# Altium PCB hat_template 2023.PcbDoc (part 1 of 2)
Units mm, origin at the board's own origin, x right, y up, seen from the top; angles counter-clockwise.
Board outline 64 x 85 mm, 4 copper layers (Top Layer, Ground Plane, Power Plane, Bottom Layer), stack 0.844 mm thick; 119 components, 62 nets, 322 pads, 111 vias.
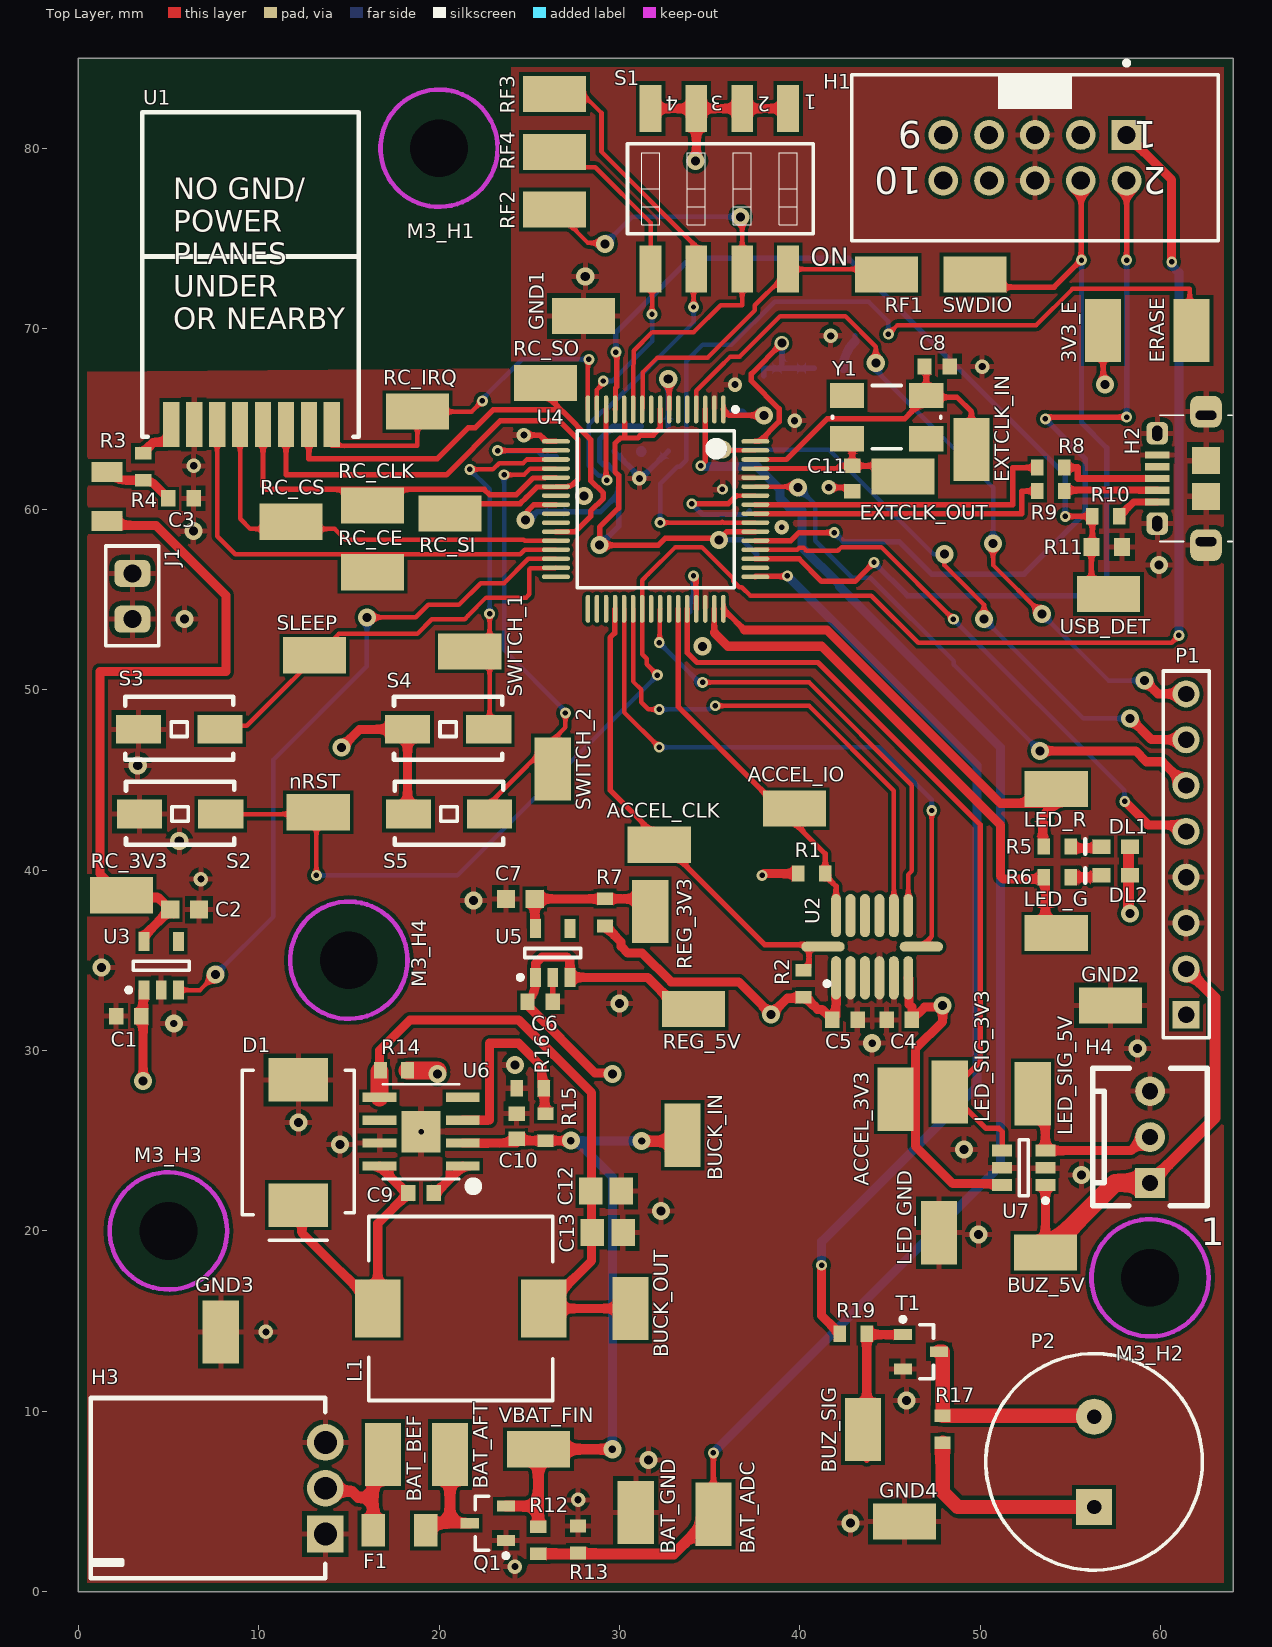
[diagram p0: Top Layer view]
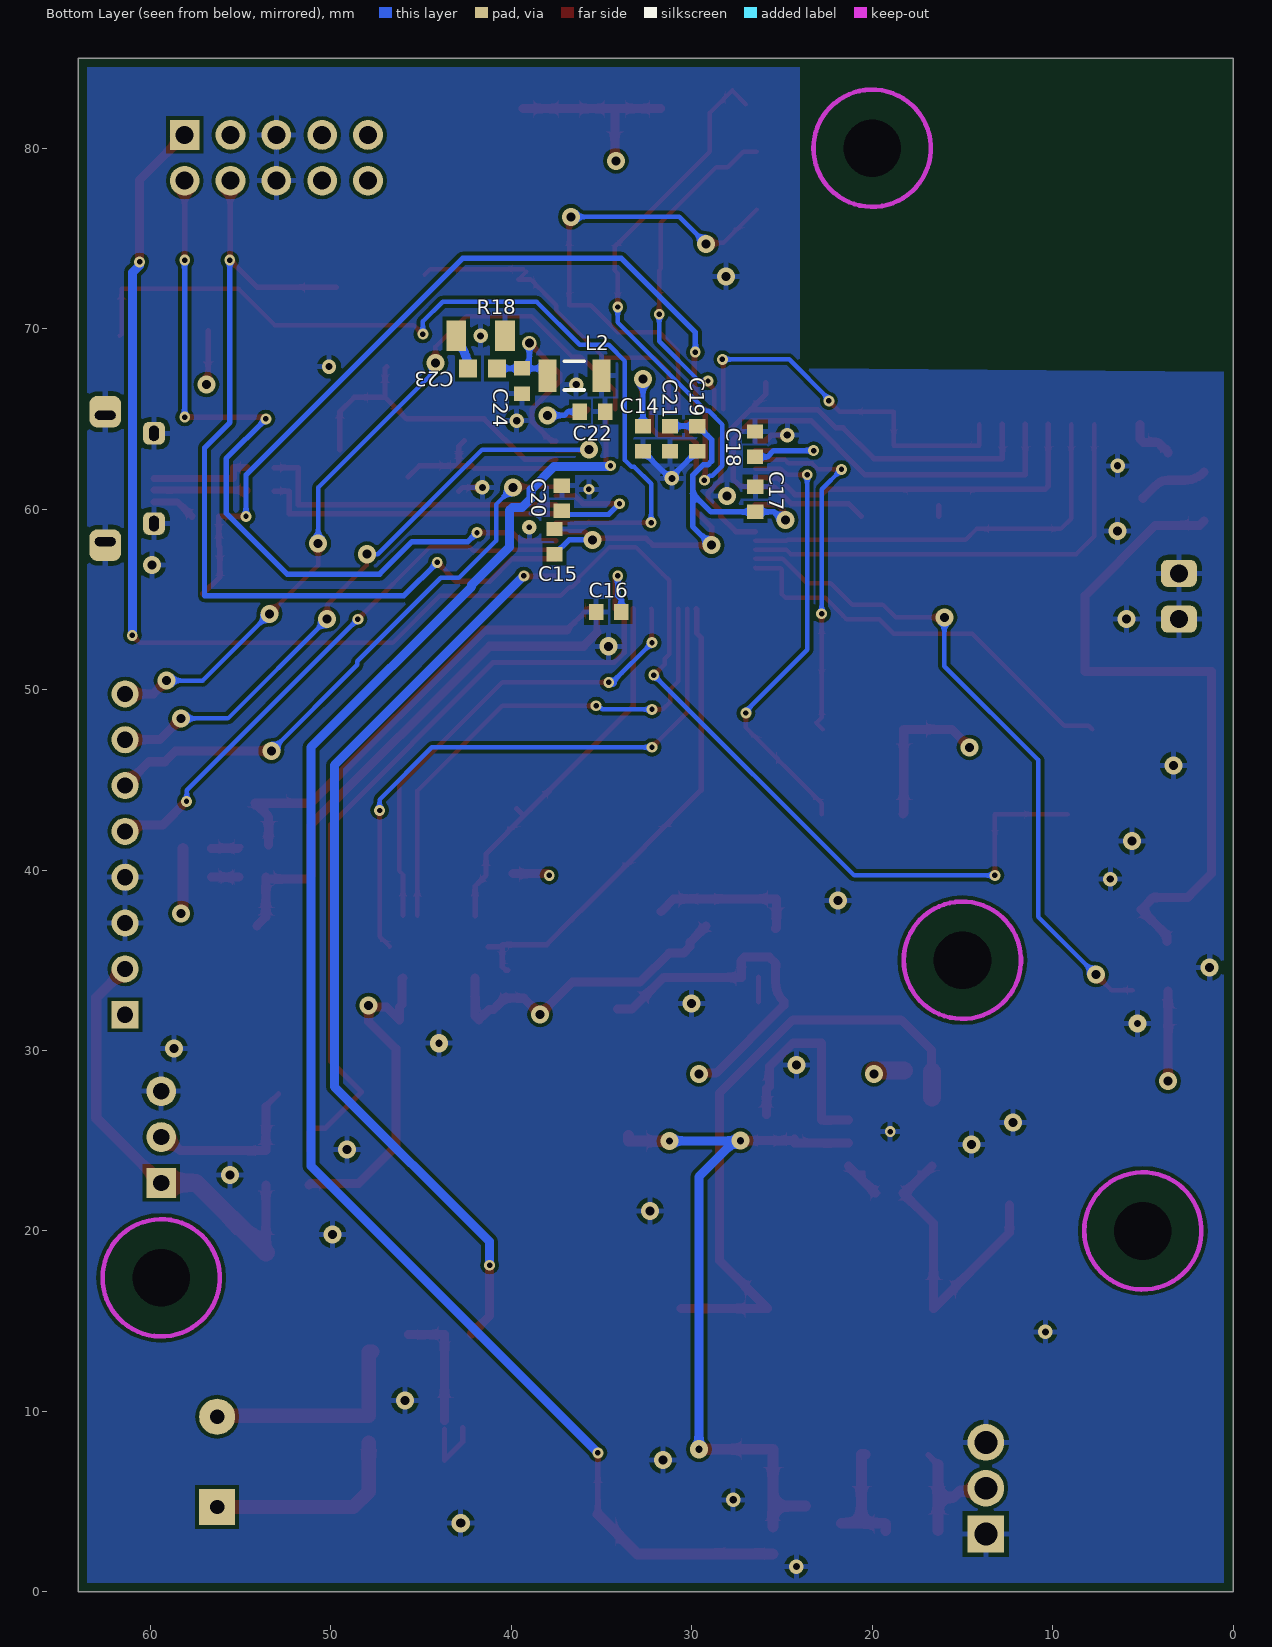
[diagram p1: Bottom Layer view, seen from below]
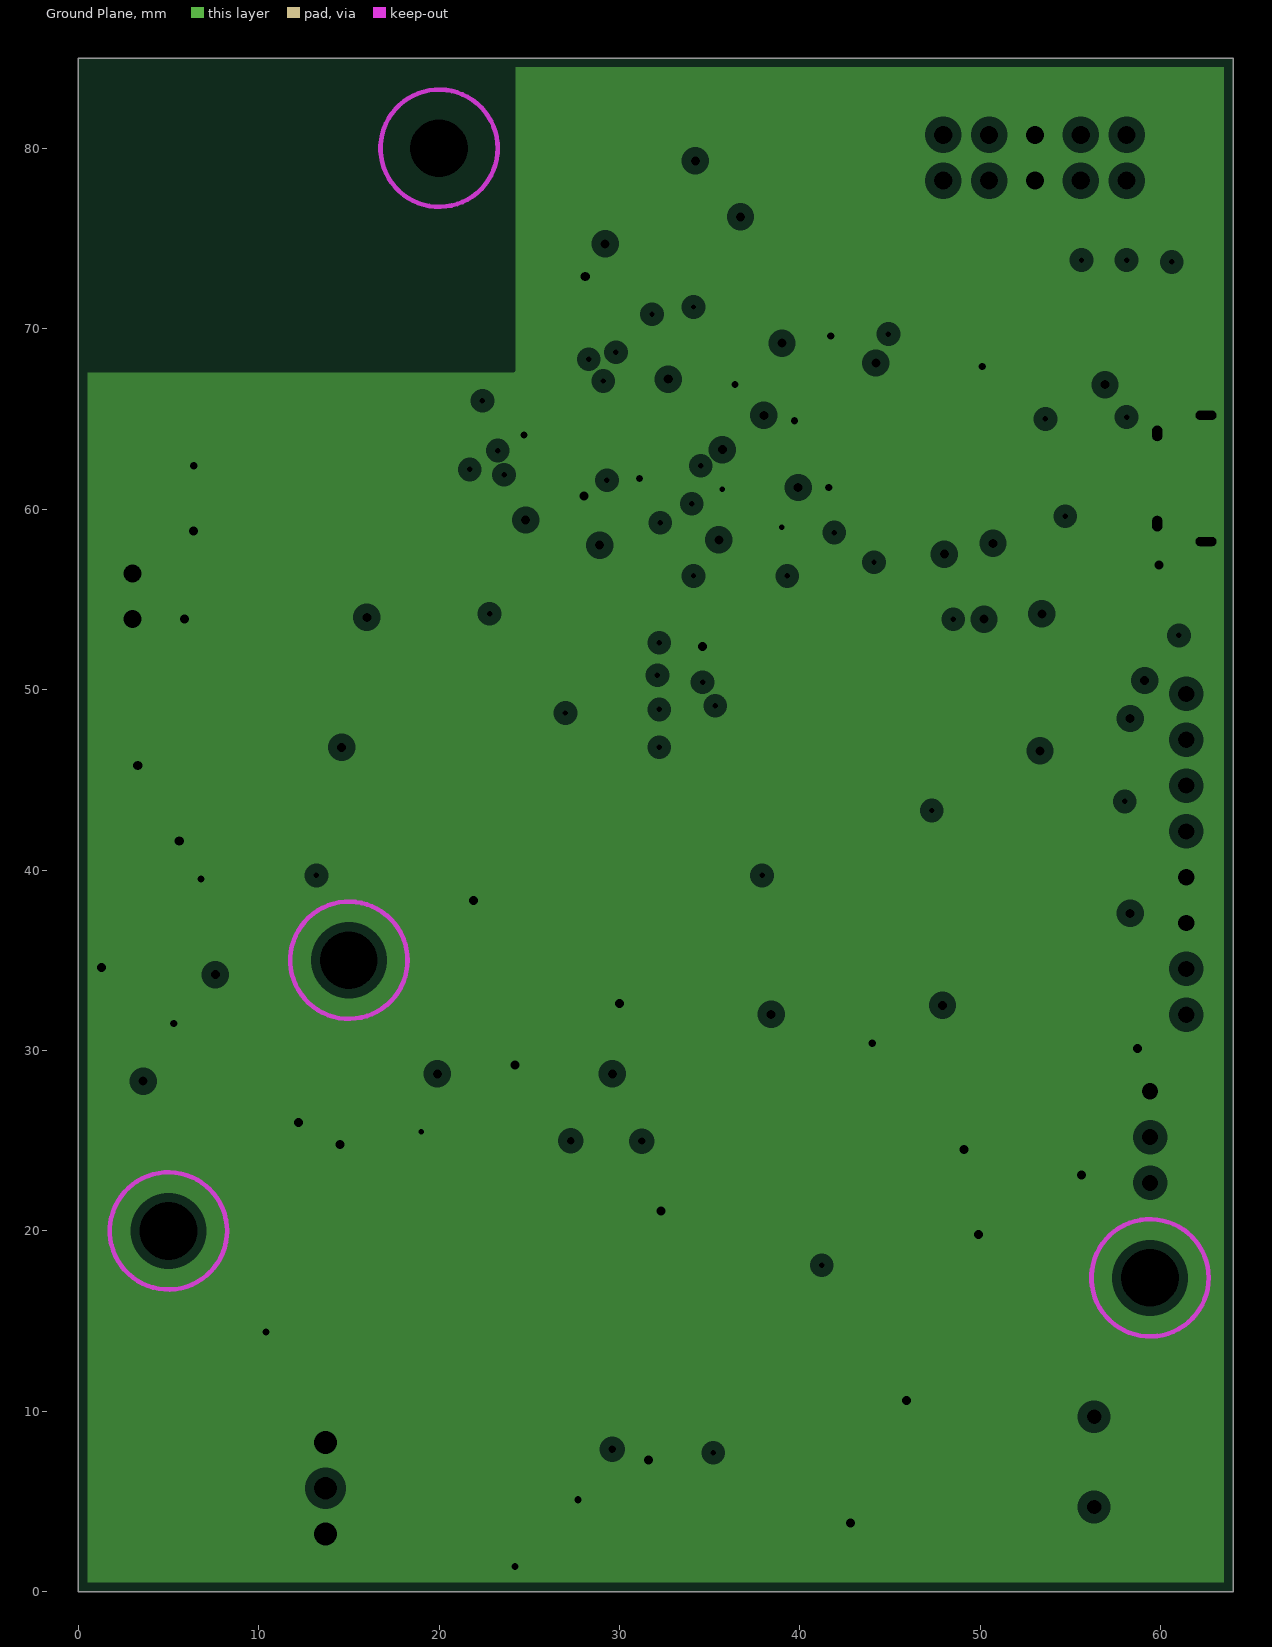
[diagram p2: Ground Plane, clearances drawn from the general rule]
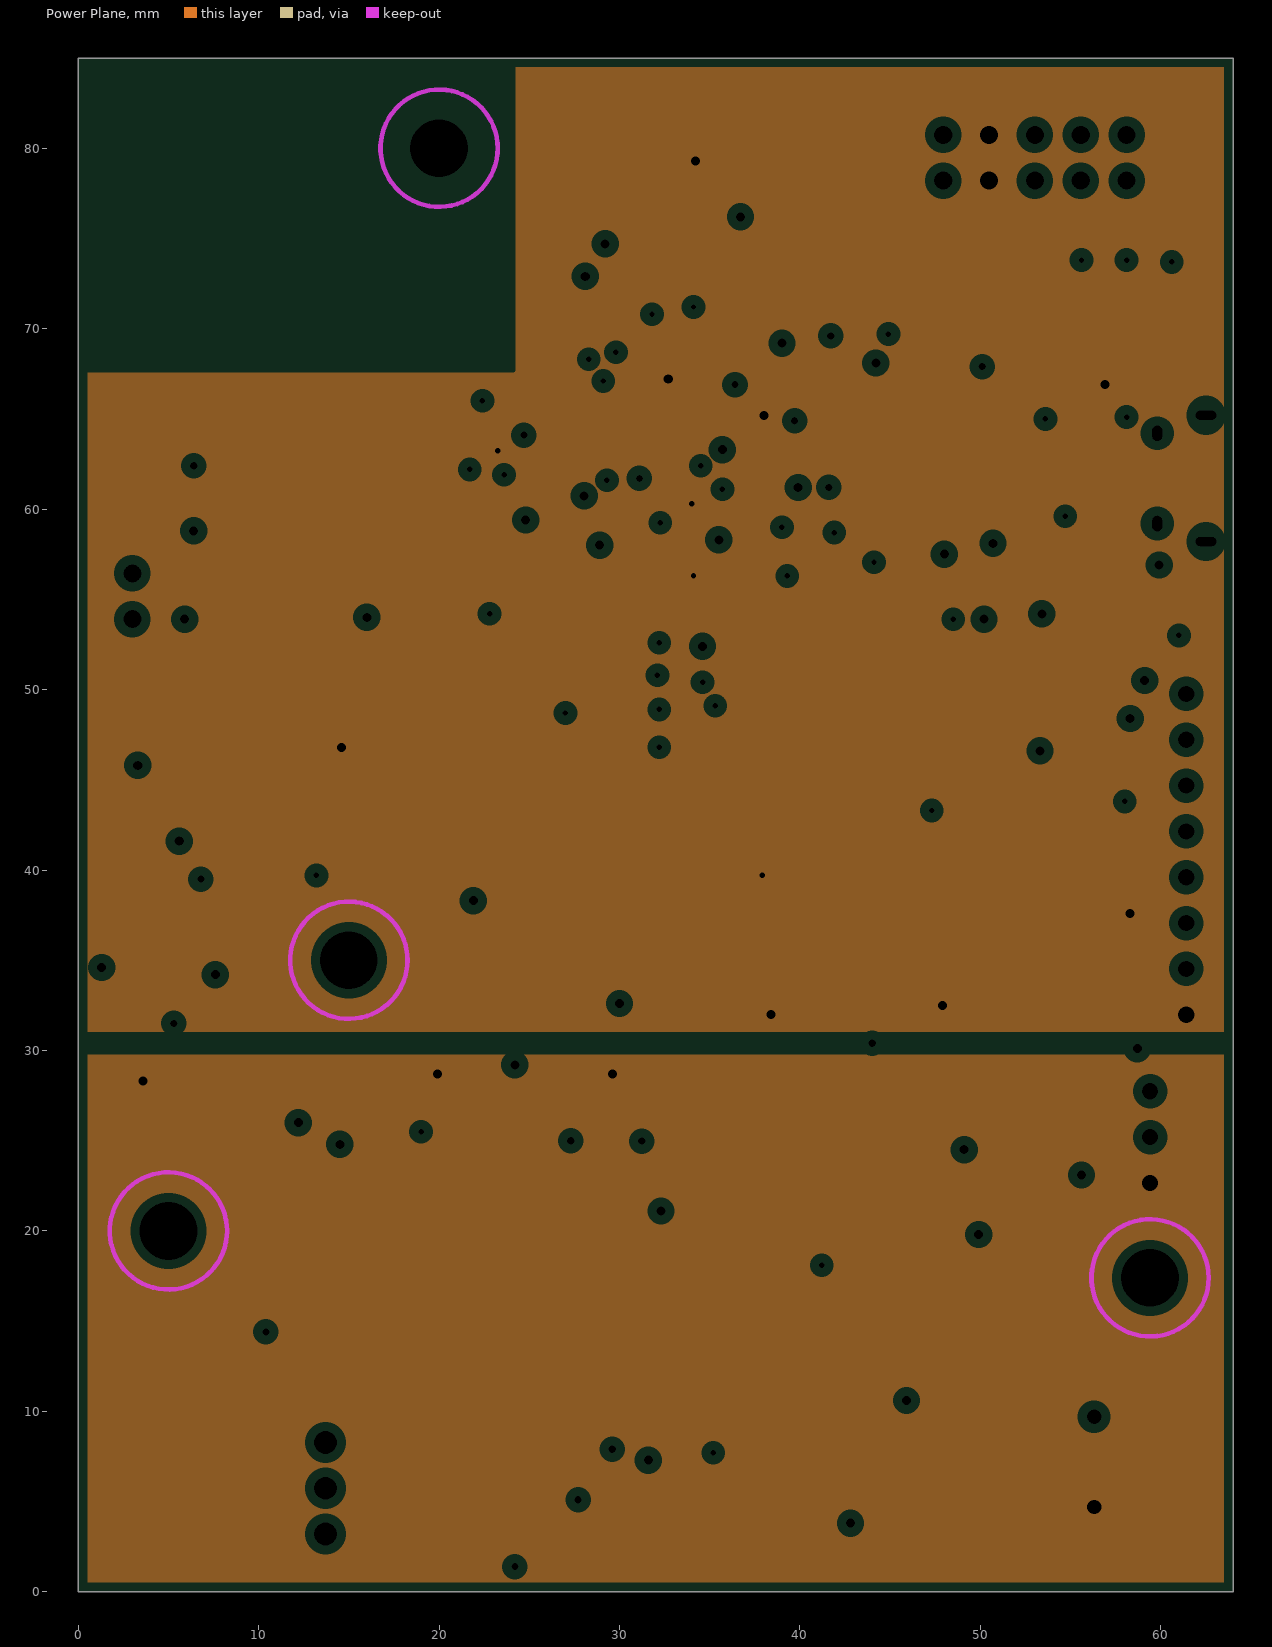
[diagram p3: Power Plane, clearances drawn from the general rule]

## Layer stack, top to bottom
Top Solder: solder mask 0.0102, Solder Resist, Dk 3.5
Top Layer: signal copper 0.0356
Dielectric 1: core 0.32, FR-4, Dk 4.8
Ground Plane: plane copper 0.036, net GND
Dielectric 3: prepreg 0.127, Dk 4.2
Power Plane: plane copper 0.036, net (Multiple Nets)
Dielectric 4: core 0.254, Dk 4.2
Bottom Layer: signal copper 0.0356
Bottom Solder: solder mask 0.0102, Solder Resist, Dk 3.5

## Board outline
0,85 64,85 64,0 0,0 0,85

## Design rules (kind name [scope] priority, off if disabled: settings)
BoardOutlineClearance [All] p1: gap=0.5 ignorepadtopadclearanceinfootprint=FALSE
Clearance GND_POLY [InNamedPolygon('GND')] p1: gap=0.254 ignorepadtopadclearanceinfootprint=FALSE
Clearance Min_Clearance_Circuit_Labs [All] p2: gap=0.2 ignorepadtopadclearanceinfootprint=FALSE
DiffPairsRouting [All] p1: maxlimit=0.254 minlimit=0.254 mostfreqgap=0.254 toplayer_minwidth=0.381 toplayer_maxwidth=0.381 toplayer_prefwidth=0.381 bottomlayer_minwidth=0.381 bottomlayer_maxwidth=0.381 bottomlayer_prefwidth=0.381 maxuncoupledlength=12.7
FanoutControl Fanout_BGA [IsBGA] p1 off: bgadir=Out bgaviamode=Centered fanoutstyle=Auto fanoutdirection=Alternating viagrid=0.025 // Fanout_BGA (Default Rule)
Height [All] p1: minheight=0 maxheight=50.8 prefheight=12.7
HoleSize [All] p1: absolutevalues=TRUE maxlimit=10 minlimit=0.3 maxpercent=80.000 minpercent=20.000
MinimumAnnularRing [All] p1: minimumring=0.1
MinimumSolderMaskSliver [All] p1: minsoldermaskwidth=0.102
NetAntennae [All] p1: netantennaetolerance=1
PlaneClearance [All] p1: clearance=0.508
PlaneConnect [All] p1: planeconnectstyle=Relief reliefexpansion=0.508 reliefentries=4 reliefconductorwidth=0.254 reliefairgap=0.254
PolygonConnect [All] p1: connectstyle=Relief reliefconductorwidth=0.305 reliefentries=4 polygonreliefangle="90 Angle" airgapwidth=0.254
RoutingVias [All] p1: holewidth=0.5 width=1 viastyle="Through Hole" minholewidth=0.3 minwidth=0.8 maxholewidth=1 maxwidth=2
SMDNeckDown [All] p1 off: percent=50.000
SMDToCorner [All] p1: distance=98425
SMDToPlane [All] p1: distance=1968504
SilkToSolderMaskClearance SilkscreenOverComponentPads [IsPad] p1: minsilkscreentomaskgap=0.2 clearancetoexposedcopper=TRUE
SolderMaskExpansion [All] p1: expansion=0.102
ViasUnderSMD [All] p1: allowed=FALSE
Width Width_1 [WithinRoom('RoomDefinition_2')] p1: maxlimit=0.254 minlimit=0.254 preferedwidth=0.254
Width [All] p2: maxlimit=2 minlimit=0.2 preferedwidth=0.3
21 further rules are at their usual default settings.

## Classes and differential pairs
component class MCU: BAT_ADC BAT_AFT BAT_BEF BAT_GND BUCK_IN BUCK_OUT BUZ_5V BUZ_SIG C6 C7 C8 C9 C10 C11 C12 C13 C14 C15 C16 C17 C18 C19 C20 C21 C22 C23 C24 D1 EXTCLK_IN EXTCLK_OUT F1 GND1 GND2 GND3 GND4 H2 H3 H4 J1 L1 L2 LED_GND LED_SIG_3V3 LED_SIG_5V P2 Q1 R7 R8 R9 R10 R11 R12 R13 R14 R15 R16 R17 R18 R19 REG_3V3 REG_5V T1 U4 U5 U6 U7 USB_DET VBAT_FIN Y1
component class MCU2: 3V3_E ACCEL_3V3 ACCEL_CLK ACCEL_IO C1 C2 C3 C4 C5 DL1 DL2 ERASE H1 LED_G LED_R nRST P1 R1 R2 R3 R4 R5 R6 RC_3V3 RC_CE RC_CLK RC_CS RC_IRQ RC_SI RC_SO RF1 RF2 RF3 RF4 S1 S2 S3 S4 S5 SLEEP SWDIO SWITCH_1 SWITCH_2 U1 U2 U3
differential pair D: +D_P -D_N

## Components (designator, comment, footprint, x,y, rotation, side; value= is the part's Value field where it differs from the comment)
3V3_E "3V3" TP_1206#1 56.8,69.9 r90 top locked value=TP
ACCEL_3V3 "TP" TP_1206#1 45.3,27.3 r90 top
ACCEL_CLK "TP" TP_1206#1 32.2,41.4 r180 top locked
ACCEL_IO "TP" TP_1206#1 39.7,43.4 r180 top locked
BAT_ADC "TP" TP_1206#1 35.2,4.3 r90 top locked
BAT_AFT "TP" TP_1206#2 20.4,7.6 r90 top locked
BAT_BEF "TP" TP_1206#1 16.9,7.6 r270 top locked
BAT_GND "TP" TP_1206#1 30.9,4.4 r90 top locked
BUCK_IN "TP" TP_1206#1 33.5,25.3 r270 top locked
BUCK_OUT "TP" TP_1206#1 30.6,15.7 r90 top locked
BUZ_5V "TP" TP_1206#1 53.6,18.8 r180 top locked
BUZ_SIG "TP" TP_1206#1 43.5,9 r90 top locked
C1 "1uF" CAPC1608L 2.8,31.9 r180 top
C2 "4.7uF" CAPC1608N 5.9,37.8 r180 top locked
C3 "10uF" CAPC1608L 5.7,60.6 r180 top
C4 "100nF" CAPC1608L 45.5,31.7 r0 top locked
C5 "10uF" CAPC1608L 42.5,31.7 r180 top locked
C6 "1uF" CAPC1608L 25.6,32.7 r0 top
C7 "4.7uF" CAPC1608N 24.5,38.4 r0 top locked
C8 "27pF" CAPC1608L 47.6,67.9 r180 top locked
C9 "100nF" CAPC1608L 19,22.1 r0 top locked
C10 "10uF" CAPC1608L 24.3,25.8 r270 top locked
C11 "27pF" CAPC1608L 42.9,61.7 r90 top
C12 "CC_47uF_0805_6V3" CAPC2012N 29.25,22.2 r180 top locked
C13 "CC_47uF_0805_6V3" CAPC2012N 29.35,19.9 r180 top locked
C14 "100nF" CAPC1608L 32.7,63.9 r90 bottom locked
C15 "100nF" CAPC1608L 37.6,58.2 r90 bottom locked
C16 "100nF" CAPC1608L 34.6,54.3 r180 bottom locked
C17 "100nF" CAPC1608L 26.475,60.55 r90 bottom locked
C18 "100nF" CAPC1608L 26.5,63.6 r270 bottom locked
C19 "100nF" CAPC1608L 29.7,63.9 r270 bottom locked
C20 "100nF" CAPC1608L 37.2,60.6 r270 bottom locked
C21 "100nF" CAPC1608L 31.2,63.9 r270 bottom locked
C22 "100nF" CAPC1608L 35.5,65.4 r0 bottom locked
C23 "4.7uF" CAPC1608N 41.6,67.8 r180 bottom locked
C24 "100nF" CAPC1608L 39.4,67.1 r90 bottom locked
D1 "VS-30BQ015-M3/9AT" SMC 12.2,24.9 r270 top
DL1 "Red" WL-SMCW0603 56.7,41.3 r0 top locked
DL2 "Green" WL-SMCW0603 56.7,39.7 r0 top locked
ERASE "Erase" TP_1206#1 61.7,69.9 r90 top locked value=TP
EXTCLK_IN "TP" TP_1206#1 49.5,63.3 r90 top locked
EXTCLK_OUT "TP" TP_1206#1 45.7,61.8 r180 top locked
F1 "5A" RESC3216N 17.8,3.4 r0 top locked
GND1 "TP" TP_1206#1 28,70.7 r0 top
GND2 "TP" TP_1206#1 57.2,32.5 r0 top
GND3 "TP" TP_1206#1 7.9,14.4 r90 top locked
GND4 "TP" TP_1206#1 45.8,3.9 r180 top locked
H1 "Header 5X2 Vert" IDC2.54-V10D 53.02,79.47 r180 top locked
H2 "JS_USB_MICRO_B" FCI_USB_10118194-0001LF 63.95,61.7 r90 top
H3 "Battery_HEADER_3pin" BATT_HEADER_3POS 13.7,5.74 r90 top locked
H4 "3 Pin Molex KK Hdr" MOLEX_KK_3_HDR 59.4,22.66 r90 top locked
J1 "100Mil Jumper" JMP2.54 3,53.9 r90 top locked
L1 "IND 5.2UH 6A" INDUCTOR5u2 21.2,15.7 r0 top locked
L2 "1A max, Idc 0.3R," INDC3216L 36.5,67.4 r180 bottom locked
LED_G "TP" TP_1206#1 54.2,36.5 r180 top locked
LED_GND "TP" TP_1206#1 47.7,19.9 r90 top locked
LED_R "TP" TP_1206#1 54.2,44.5 r180 top locked
LED_SIG_3V3 "TP" TP_1206#1 48.3,27.7 r90 top locked
LED_SIG_5V "TP" TP_1206#1 52.9,27.6 r270 top
M3_H1 "Comment" MNT-HOLE_3.2mm_NPTH 20,80 r0 top
M3_H2 "Comment" MNT-HOLE_3.2mm_NPTH 59.4,17.4 r0 top
M3_H3 "Comment" MNT-HOLE_3.2mm_NPTH 5,20 r0 top
M3_H4 "Comment" MNT-HOLE_3.2mm_NPTH 15,35 r0 top
nRST "TP" TP_1206#1 13.3,43.2 r180 top locked
P1 "JA_PIN_Header 8" HDR1X8 61.4,31.98 r90 top
P2 "Piezo Buzzer" BUZZER 56.3,4.7 r90 top
Q1 "SSM3J328R,LF" SOT23_L 22.7,3.8 r180 top locked
R1 "4K7" RESC1608L 40.65,39.8 r0 top locked
R2 "4K7" RESC1608L 40.2,33.7 r90 top locked
R3 "1R" RESC3216L 1.6,60.7 r90 top locked
R4 "0R" RESC1608L 3.6,62.35 r270 top locked
R5 "3K" RESC1608L 54.25,41.3 r180 top locked
R6 "1K8" RESC1608L 54.25,39.6 r180 top locked
R7 "0R" RESC1608L 29.2,37.65 r270 top locked
R8 "27R" RESC1608L 53.9,62.3 r180 top locked
R9 "27R" RESC1608L 53.9,61 r180 top locked
R10 "27K" RESC1608L 56.95,59.6 r180 top locked
R11 "47K" RESC1608N 57,57.9 r180 top locked
R12 "150K" RESC1608L 25.5,2.85 r90 top locked
R13 "100K" RESC1608L 27.7,2.9 r270 top
R14 "0R" RESC1608L 17.5,28.9 r0 top locked
R15 "#NAME?" RESC1608L 25.9,25.75 r270 top locked value=180K
R16 "56K" RESC1608L 25.05,27.9 r0 top locked
R17 "1K" RESC1608L 47.9,9 r270 top locked
R18 "1R" RESC3216L 41.7,69.6 r0 bottom locked
R19 "3K3" RESC1608L 42.95,14.3 r0 top locked
RC_3V3 "TP" TP_1206#1 2.4,38.6 r180 top locked
RC_CE "TP" TP_1206#1 16.3,56.5 r180 top locked
RC_CLK "TP" TP_1206#1 16.3,60.2 r180 top locked
RC_CS "TP" TP_1206#1 11.8,59.3 r180 top locked
RC_IRQ "TP" TP_1206#1 18.8,65.4 r180 top locked
RC_SI "TP" TP_1206#1 20.6,59.75 r180 top locked
RC_SO "TP" TP_1206#1 25.9,67 r180 top locked
REG_3V3 "TP" TP_1206#1 31.7,37.7 r90 top locked
REG_5V "TP" TP_1206#1 34.1,32.3 r180 top locked
RF1 "TP" TP_1206#1 44.8,73 r0 top locked
RF2 "TP" TP_1206#1 26.4,76.6 r0 top locked
RF3 "TP" TP_1206#1 26.4,83 r0 top locked
RF4 "TP" TP_1206#1 26.4,79.8 r0 top locked
S1 "WS_SW DIP-4" "DIP_SW_4WAY_SMD -" 39.34,82.2 r180 top locked
S2 "EVQPNF05M" EVQPNF05M 5.65,43.1 r0 top
S3 "EVQPNF05M" EVQPNF05M 5.6,47.8 r0 top
S4 "EVQPNF05M" EVQPNF05M 20.5,47.8 r0 top locked
S5 "EVQPNF05M" EVQPNF05M 20.55,43.1 r0 top locked
SLEEP "TP" TP_1206#1 13.1,51.9 r180 top locked
SWDIO "TP" TP_1206#1 49.7,73 r180 top locked
SWITCH_1 "TP" TP_1206#1 21.7,52.1 r180 top locked
SWITCH_2 "TP" TP_1206#1 26.3,45.6 r270 top locked
T1 "BSH105,215" SOT23_L 46.7,13.3 r0 top locked
U1 "nRF24 SMD" NRF24 3.557,64 r0 top locked
U2 "ADXL345BCCZ" ADI-CC-14-1_V 44,35.75 r90 top locked
U3 "CAT6219-330TDGT3" SOT95P280X145-5N 4.6,34.7 r90 top locked
U4 "ATSAM4S8BA-ANR" LQFP64_L 32,60 r270 top locked
U5 "CAT6219-330TDGT3" SOT95P280X145-5N 26.3,35.4 r90 top locked
U6 "ADP2302ARDZ-5.0 BUCK" RD_8_1 19,25.5 r180 top locked value=Value
U7 "SN74LVC1T45" SOT23-6_N 52.4,23.5 r180 top locked
USB_DET "TP" TP_1206#1 57.1,55.3 r180 top locked
VBAT_FIN "TP" TP_1206#1 25.5,7.9 r180 top locked
Y1 "12MHz" 6.0X3.5-4 44.8,65.1 r0 top

## Footprints (in the part's own frame and the unit in brackets; to place one, negate y for a bottom-side part, rotate by r counter-clockwise, add the part's x,y. Pads: shape width x height; smd on the part's side, far side on the other; paste and mask are expansions set on the pad)
6.0X3.5-4 [mm] "4 SMD 6.0X3.5 mm No Lead Crystal"
  rect 1.9x1.4 smd: 1(-2.2,-1.2) 2(2.2,-1.2) 3(2.2,1.2) 4(-2.2,1.2)
  silkscreen extent -3,-1.75 3,1.75, body extent -3,-1.75 3,1.75, height 1.2
ADI-CC-14-1_V [mm]
  oval 2.4x0.55 smd: 1(-1.725,2) 2(-1.725,1.2) 3(-1.725,0.4) 4(-1.725,-0.4) 5(-1.725,-1.2) 6(-1.725,-2) 8(1.725,-2) 9(1.725,-1.2) 10(1.725,-0.4) 11(1.725,0.4) 12(1.725,1.2) 13(1.725,2)
  oval 0.55x2.4 smd: 7(0,-2.725) 14(0,2.725)
  silkscreen extent -2.18,2.37 -1.93,2.62, body extent -1.5,-2.5 1.5,2.5, height 1
BATT_HEADER_3POS [mil]
  rect 80x80 hole 50: 1(-100,0)
  round 80 hole 50: 2(0,0) 3(100,0)
  silkscreen extent -197,0 197,512, body extent -197,-31 200,504, height 294
BUZZER [mm]
  rect 2x2 hole 0.8: 1(0,0)
  round 2 hole 0.8: 2(5,0)
  silkscreen extent -3.5,-6 8.5,6, body extent -3.58,-6.08 8.58,6.08, height 6.5
CAPC1608L [mm] "Chip Capacitor, Body 1.6x0.8mm, IPC High Density"
  rect 0.8x0.9 smd: 1(-0.7,0) 2(0.7,0)
  body extent -0.87,-0.48 0.87,0.48, height 0.85
CAPC1608N [mm] "Chip Capacitor, Body 1.6x0.8mm, IPC Medium Density"
  rect 1x1 smd: 1(-0.8,0) 2(0.8,0)
  body extent -0.87,-0.48 0.87,0.48, height 0.85
CAPC2012N [mm] "Chip Capacitor, Body 2.0x1.3mm, IPC Medium Density"
  rect 1.3x1.5 smd: 1(-0.85,0) 2(0.85,0)
  body extent -1.1,-0.72 1.1,0.72, height 1.1
"DIP_SW_4WAY_SMD -" [mm] "DIP Switch; 8 Leads"
  rect 1.2x2.6 smd: 1(0,0) 2(2.54,0) 3(5.08,0) 4(7.62,0) 5(7.62,8.89) 6(5.08,8.9) 7(2.54,8.9) 8(0,8.9)
  silkscreen extent -1.4,1.95 8.9,6.95
EVQPNF05M [mm] "Panansonic light touch SMD push button switch"
  rect 2.5x1.6 smd: 1(-2.25,0) 2(2.25,0)
  silkscreen extent -3,-1.7 3,1.8, body extent -3,-1.7 3,1.8, height 5
FCI_USB_10118194-0001LF [mm] "Micro USB B Type Receptacle"
  rect 0.4x1.35 smd mask+0.07: 1(-1.3,4.15) 2(-0.65,4.15) 3(0,4.15) 4(0.65,4.15) 5(1.3,4.15)
  rrect50% 1.75x1.75 hole 0.5 slot 1.15 at 90 deg copper offset -0.2,0 paste+0 mask+0.1: 6(-3.5,1.45)
  rrect50% 1.25x1.2 hole 0.55 slot 0.85 at 0 deg: 6(-2.5,4.15) 6(2.5,4.15)
  rect 1.5x1.55 smd: 6(-1,1.45) 6(1,1.45)
  rrect50% 1.75x1.75 hole 0.5 slot 1.15 at 90 deg copper offset 0.2,0 paste+0 mask+0.1: 6(3.5,1.45)
  silkscreen extent -3.5,0 3.5,4
HDR1X8 [mm] "Connector; Header; 8 Position"
  rect 1.5x1.5 hole 0.9: 1(0,0)
  round 1.5 hole 0.9: 2(2.54,0) 3(5.08,0) 4(7.62,0) 5(10.16,0) 6(12.7,0) 7(15.24,0) 8(17.78,0)
  silkscreen extent -1.27,-1.27 19.05,1.27, body extent -1.24,-1.3 19.04,1.2, height 8.54
IDC2.54-V10D [mm] "Connector; IDC, Low Profile Male Header, Thru-Hole; 10 Position; Vertical; Pitch 2.54 mm; Body 20.32 x 9.2 x 9.45 mm (LxWxH)"
  rect 1.65x1.65 hole 1: 1(-5.08,-1.27)
  round 1.65 hole 1: 2(-5.08,1.27) 3(-2.54,-1.27) 4(-2.54,1.27) 5(0,-1.27) 6(0,1.27) 7(2.54,-1.27) 8(2.54,1.27) 9(5.08,-1.27) 10(5.08,1.27)
  silkscreen extent -10.16,-5.37 10.16,4.6, body extent -10.16,-4.6 10.16,4.6, height 9.45
INDC3216L [mm] "Chip Inductor, Body 3.2x1.6mm, IPC High Density"
  rect 1x1.8 smd: 1(-1.5,0) 2(1.5,0)
  silkscreen extent -0.55,-0.8 0.55,0.8, body extent -1.75,-0.95 1.75,0.95, height 1.9
INDUCTOR5u2 [mm]
  rect 2.5x3.2 smd: 1(-4.6,0) 2(4.6,0)
  silkscreen extent -5.1,-5.1 5.1,5.1, body extent -5,-5 5,5, height 3.8
JMP2.54 [mm] "Jumper Change over 2.54mm"
  rrect50% 1.5x2 hole 1: 1(0,0) 2(2.544,0)
  silkscreen extent -1.47,-1.47 4.05,1.47, body extent -1.43,-1.43 4.05,1.43, height 8.45
LQFP64_L [mm] "Thin QFP, 64-Leads, Body 10x10mm, Pitch 0.5mm, IPC High Density"
  oval 1.55x0.25 smd mask+0.07: 1(-5.525,3.75) 2(-5.525,3.25) 3(-5.525,2.75) 4(-5.525,2.25) 5(-5.525,1.75) 6(-5.525,1.25) 7(-5.525,0.75) 8(-5.525,0.25) 9(-5.525,-0.25) 10(-5.525,-0.75) 11(-5.525,-1.25) 12(-5.525,-1.75) 13(-5.525,-2.25) 14(-5.525,-2.75) 15(-5.525,-3.25) 16(-5.525,-3.75) 33(5.525,-3.75) 34(5.525,-3.25) 35(5.525,-2.75) 36(5.525,-2.25) 37(5.525,-1.75) 38(5.525,-1.25) 39(5.525,-0.75) 40(5.525,-0.25) 41(5.525,0.25) 42(5.525,0.75) 43(5.525,1.25) 44(5.525,1.75) 45(5.525,2.25) 46(5.525,2.75) 47(5.525,3.25) 48(5.525,3.75)
  oval 0.25x1.55 smd mask+0.07: 17(-3.75,-5.525) 18(-3.25,-5.525) 19(-2.75,-5.525) 20(-2.25,-5.525) 21(-1.75,-5.525) 22(-1.25,-5.525) 23(-0.75,-5.525) 24(-0.25,-5.525) 25(0.25,-5.525) 26(0.75,-5.525) 27(1.25,-5.525) 28(1.75,-5.525) 29(2.25,-5.525) 30(2.75,-5.525) 31(3.25,-5.525) 32(3.75,-5.525) 49(3.75,5.525) 50(3.25,5.525) 51(2.75,5.525) 52(2.25,5.525) 53(1.75,5.525) 54(1.25,5.525) 55(0.75,5.525) 56(0.25,5.525) 57(-0.25,5.525) 58(-0.75,5.525) 59(-1.25,5.525) 60(-1.75,5.525) 61(-2.25,5.525) 62(-2.75,5.525) 63(-3.25,5.525) 64(-3.75,5.525)
  silkscreen extent -5.65,-4.35 4.35,4.55, body extent -5,-5 5,5, height 1.6
MNT-HOLE_3.2mm_NPTH [mm] "Mounting Hole 3.2mm non plated"
  round 0 hole 3.2 unplated: 1(0,0)
  Keep-Out Layer circle w0.254: c0,0 r3.25
MOLEX_KK_3_HDR [mil] "MOLEX_KK_3_HDR"
  rect 65x65 hole 35.43: 1(0,0)
  round 65 hole 35.43: 2(100,0) 3(200,0)
  silkscreen extent -50,-125 250,125, body extent -50,-114 250,114, height 461
NRF24 [mm]
  rect 0.9x2.5 smd: 1(1.6,0.7) 2(2.871,0.7) 3(4.143,0.7) 4(5.414,0.7) 5(6.686,0.7) 6(7.957,0.7) 7(9.229,0.7) 8(10.5,0.7)
  silkscreen extent 0,0 12,18, body extent 0,0 12,18, height 2.27
RD_8_1 [mil]
  rect 74x20 smd paste+0 mask+0: 1(-91,75) 2(-91,25) 3(-91,-25) 4(-91,-75) 5(91,-75) 6(91,-25) 7(91,25) 8(91,75)
  rect 84.65x90 smd paste-44.5 mask+0: EPAD(0,0)
  silkscreen extent -118,-104 84,123, body extent 0,0 10,10, height 10
RESC1608L [mm] "Chip Resistor, Body 1.6x0.8mm, IPC High Density"
  rect 0.7x0.9 smd: 1(-0.75,0) 2(0.75,0)
  body extent -0.85,-0.48 0.85,0.48, height 0.9
RESC1608N [mm] "Chip Resistor, Body 1.6x0.8mm, IPC Medium Density"
  rect 0.9x1 smd: 1(-0.85,0) 2(0.85,0)
  body extent -0.85,-0.48 0.85,0.48, height 0.6
RESC3216L [mm] "Chip Resistor, Body 3.1x1.6mm, IPC High Density"
  rect 1.1x1.7 smd: 1(-1.35,0) 2(1.35,0)
  body extent -1.68,-0.87 1.68,0.87, height 2.54
RESC3216N [mm] "Chip Resistor, Body 3.2x1.6mm, IPC Medium Density"
  rect 1.3x1.8 smd: 1(-1.45,0) 2(1.45,0)
  body extent -1.68,-0.87 1.68,0.87, height 0.71
SMC [mm] "DO-214-AB/SMC; 2 C-Bend Leads; Body 7.9 x 5.9 mm, inc. leads (LxW)"
  rect 2.4x3.3 smd: 1(-3.475,0) 2(3.475,0)
  silkscreen extent -4,-3.1 5.43,3.1
SOT23-6_N [mm]
  rect 1.1x0.65 smd: 1(-1.2,0.95) 2(-1.2,0) 3(-1.2,-0.95) 4(1.2,-0.95) 5(1.2,0) 6(1.2,0.95)
  silkscreen extent -1.33,-1.55 0.25,1.95, body extent -0.9,-1.55 0.9,1.55, height 1.45
SOT23_L [mm] "SOT23, 3-Leads, Body 2.9x1.3mm, Pitch 0.95mm, Lead Span 2.3mm, IPC High Density"
  rect 1x0.6 smd: 1(-1,0.95) 2(-1,-0.95) 3(1,0)
  silkscreen extent -1.13,-1.5 0.7,1.92, body extent -0.7,-1.5 0.7,1.5, height 1.1
SOT95P280X145-5N [mm] "SOT23, 5-Leads, Body 2.90x2.80mm, Pitch 0.95mm, IPC Medium Density"
  rect 1.05x0.6 smd: 1(-1.35,0.95) 2(-1.35,0) 3(-1.35,-0.95) 4(1.35,-0.95) 5(1.35,0.95)
  silkscreen extent -1.47,-1.55 0.25,1.92, body extent -0.87,-1.52 0.87,1.53, height 1.45
TP_1206#1 [mm] "Test Point Pad"
  rect 3.5x2 smd: 1(0,0)
  body extent -1.62,-0.85 1.63,0.8, height 2
TP_1206#2 [mm] "Test Point Pad"
  rect 3.5x2 smd: 1(0,-0.2)
  body extent -1.62,-0.85 1.63,0.8, height 2
WL-SMCW0603 [mm] "2.4 x 0.8 x 0.7mm LED"
  rect 1x0.8 smd: 1(0,0) 2(1.6,0)
  silkscreen extent -0.9,-0.4 -0.9,0.4

## Part data
3V3_E ACCEL_3V3 ACCEL_CLK ACCEL_IO BAT_ADC BAT_AFT BAT_BEF BAT_GND BUCK_IN BUCK_OUT BUZ_5V BUZ_SIG ERASE EXTCLK_IN EXTCLK_OUT GND1 GND2 GND3 GND4 LED_G LED_GND LED_R LED_SIG_3V3 LED_SIG_5V nRST RC_3V3 RC_CE RC_CLK RC_CS RC_IRQ RC_SI RC_SO REG_3V3 REG_5V RF1 RF2 RF3 RF4 SLEEP SWDIO SWITCH_1 SWITCH_2 USB_DET VBAT_FIN: library part TP_1206, "Test-Point 3.3x1.6x2.1mm SMD", Manufacturer="Harwin Inc", Manufacturer Part Number=S1751-46R, Supplier Part Number 1=952-1478-2-ND, Mounting Type="Surface Mount", Storage Location=ProtoPlace, Supplier="ECE Dept", Supplier 1=Digi-Key, Supplier 2=Farnell, Supplier Part Number 2=1826282, Type="PC Test Point"
C1 C6: library part CC_1uF_0603, "CAP CER 1uF Y5V -20% +80% 16V 0603", Max Voltage=16V, Code_IPC="1608 [0603]", PackageReference=0603, Storage Location="PCB Assembly WS", Supplier="ECE Dept"
C2 C7 C23: library part CC_4.7uF_0603, "CAP CER 4.7uF X5R +-20%  10V 0603", Max Voltage=10V, Code_IPC=2012[0805], Note="Footprint corresponds to dimensions for bulk cassette packaging. This case size has tightened tolerances.", PackageReference=0805, Storage Location="PCB Assembly WS", Supplier="ECE Dept"
C3 C5 C10: library part CC_10uF_0603, "CAP CER 10UF X5R +-20% 6V3 0603", Voltage - Rated=6.3V, Storage Location="PCB Assembly WS", Supplier="ECE Dept"
C4 C9 C14 C15 C16 C17 C18 C19 C20 C21 C22 C24: library part CC_100nF_0603, "CAP CER 100nF X7R +-10% 50V 0603", Code_IPC="1608 [0603]", PackageReference=0603, Storage Location="PCB Assembly WS", Supplier="ECE Dept"
C8 C11: library part CC_27pF_0603, "CAP CER 27pF NPO/COG +-5% 50V 0603", Code_IPC="1608 [0603]", PackageReference=0603, Storage Location="PCB Assembly WS", Supplier="ECE Dept"
C12 C13: "SAMSUNG ELECTRO-MECHANICS - CL21A476MQCLRNC - CAP, 47UF, 6.3V, MLCC, 0805", Capacitance=47uF, Case/Package=0805, Case Code (Metric)=2012, Dielectric=X5R, Manufacturer 1=Samsung, Manufacturer Part Number 1=CL21A476MQCLRNC, Max Operating Temperature=85°C, Min Operating Temperature=-55°C, Package Quantity=4000, Supplier Part Number 1=1276-2420-1-ND, Tolerance=20%, Voltage Rating=6V3, Case Code (Imperial)=0805, ComponentLink1Description=https://datasheet.ciiva.com/25723/cl21a476mqclrnc-25723991.pdf?src-supplier=Digi-Key, ComponentLink1URL=https://datasheet.ciiva.com/25723/cl21a476mqclrnc-25723991.pdf?src-supplier=Digi-Key, Construction=Flat, Contact Plating=Tin, Depth=1.25mm, Lead Free="Lead Free", Length=2mm, Mount="Surface Mount", Packaging="Tape and Reel", Pricing 1="1=0.56000, 10=0.39100, 50=0.27380, 100=0.23470, 500=0.17602, 1000=0.14865 (USD)", RoHS=Yes, RoHS Compliant=Yes, Series=CL, Stock 1=94580, Supplier 1=Digi-Key, Termination=Wraparound, Thickness=0.037inch, Width=0.049inch
D1: library part DS_VS-30BQ015-M3, "DIODE, SCHOTTKY, 3A, 15V, DO-214AB / SMC", Average Rectified Current=3A, Forward Voltage=350mV, Manufacturer="Vishay Semiconductors", Max Forward Surge Current (Ifsm)=650A, Max Reverse Voltage (DC)=15V, Peak Reverse Current=4mA, Supplier Part Number=VS-30BQ015-M3/9AT-ND, Supplier Part Number 1=VS-30BQ015-M3/9ATGIDKR-ND, ComponentLink1Description=https://datasheet.ciiva.com/36181/vs-30bq015-m3-9at-36181258.pdf, ComponentLink1URL=https://datasheet.ciiva.com/36181/vs-30bq015-m3-9at-36181258.pdf, Manufacturer Part Number=VS-30BQ015-M3/9AT, Supplier=Digi-Key, Supplier 1=Digi-Key, Supplier 2=Element14, Supplier Part Number 2=2628288
DL1: library part DL_150060RS75000, "LED Red 250mcd 0603 SMD", Forward Current If=30, Forward Voltage=2, Manufacturer="WURTH ELEKTRONIK", Manufacturer Part Number=150060RS75000, Supplier Part Number 1=2322071, LED Colour=Red, LED Mounting=SMD, Lens Shape=Rectangular, Luminous Intensity=250, Storage Location="PCB Assembly WS", Supplier="ECE Dept", Supplier 1=Farnell, Viewing Angle=140°, Wavelength Typ=625
DL2: library part DL_150060GS75000, "LED Green 430mcd 0603 SMD", Forward Current If=30, Forward Voltage=3.2, Manufacturer="WURTH ELEKTRONIK", Manufacturer Part Number=150060GS75000, Supplier Part Number 1=2322070, LED Colour=Green, LED Mounting=SMD, Lens Shape=Rectangular, Luminous Intensity=430, Storage Location="PCB Assembly WS", Supplier="ECE Dept", Supplier 1=Farnell, Viewing Angle=140°, Wavelength Typ=520
F1: library part FS_Fuse_5.0A, "Fuse 5.0A Fast Acting 1206 SMD", Case/Package=1206, Case Code (Metric)=3216, DC Cold Resistance=19mR, Manufacturer="Bel TRP", Manufacturer Part Number=C1F5, Max Operating Temperature=125°C, Min Operating Temperature=-55°C, Supplier Part Number 1=507-1886-1-ND, Voltage Rating=125V, Voltage Rating (DC)=63V, Approvals=CE,cURus, Case Code (Imperial)=1206, ComponentLink1Description=http://www.farnell.com/datasheets/2571625.pdf, ComponentLink1URL=http://www.farnell.com/datasheets/2571625.pdf, ComponentLink2Description=http://belfuse.com/pdfs/C1F.pdf, ComponentLink2URL=http://belfuse.com/pdfs/C1F.pdf, ComponentLink3Description=http://www.mouser.com/ds/2/643/C1F-594910.pdf, ComponentLink3URL=http://www.mouser.com/ds/2/643/C1F-594910.pdf, ComponentLink4Description=https://belfuse.com/resources/StewartConnector/C1F.pdf, ComponentLink4URL=https://belfuse.com/resources/StewartConnector/C1F.pdf, Contact Plating=Nickel,Tin, Current Rating=5A, Fuse Type="Board Mount (Cartridge Style Excluded)", Length=0.126inch, Mount="Surface Mount", Number of Pins=2, Packaging="Tape and Reel", Pricing 1="1=0.32, 5=0.312, 10=0.298, 50=0.2662, 100=0.2479, 250=0.22032, 500=0.1836, 1000=0.17442 (USD)", Stock 1=725, Supplier 1=Digi-Key, Supplier 2=Element14, Supplier Part Number 2=2848595, Voltage Rating (AC)=125V, Width=0.062inch
H1: library part JA_HDR_IDC_5X2_VERT, "IDC Header, 2,54mm, 10-Pin, Vert", Supplier Part Number 1=1096985, Storage Location="ECE Dept Store", Supplier="ECE Dept", Supplier 1=Farnell
H2: library part JS_USB_MICRO_B_SMT, "CONN USB MICRO B RECPT SMT R/A", Manufacturer=FCI, Manufacturer Part Number=10118194-0001LF, Supplier Part Number 1=609-4618-1-ND, Features="Shielded, Solder Retention", Gender=Receptacle, Mounting Type="Surface Mount, Right Angle, Horizontal", Number of Contacts=5, Specifications="USB 2.0", Supplier 1=Digi-Key
H3: "3Pin Header 2.54mm spacing / Digikey #WM22663-ND", Supplier Part Number 1=WM22663-ND, Supplier 1=Digi-Key
H4: library part LED_Strip_Header, "CONN HEADER 3POS 2.54mm VERT_Thru Hole", Manufacturer=Molex, Manufacturer PN=22-23-2031, Supplier Part Number 1=9731156, Storage Location="ECE Dept Store", Supplier="ECE Dept", Supplier 1=Farnell
J1: library part TP_JUMPER, "2.54mm Jumper Thru Hole", Supplier Part Number 1=1097975, No. of Positions=2, No. of Rows=1, Pitch Spacing=2.54, Storage Location="ECE$ Store", Supplier="ECE Dept", Supplier 1=Farnell
L1: library part CDRH104RNP-5R2NC, "FIXED IND 5.2UH 6A 22 MOHM SMD", Current - Saturation=5.6A, DC Resistance (DCR)="22 mOhm Max", Frequency - Self Resonant=-, Manufacturer="Sumida America Components Inc.", Operating Temperature="-40°C ~ 100°C", Package / Case=Nonstandard, Supplier Part Number 1=308-2280-1-ND, Tolerance=±30%, Category="Inductors, Coils, Chokes", ComponentLink1Description=http://products.sumida.com/products/pdf/CDRH104R.pdf, ComponentLink1URL=http://products.sumida.com/products/pdf/CDRH104R.pdf, Height - Seated (Max)="0.157\" (4.00mm)", Manufacturer Part Number=CDRH104RNP-5R2NC, Material - Core=Ferrite, Mounting Type="Surface Mount", Packaging="Cut Tape (CT)", Part Status=Active, Pricing 1="1=2.9, 10=2.678, 100=1.8743, 500=1.5173 (NZD)", Q @ Freq=-, Ratings=-, RoHS="RoHS Compliant", Shielding=Shielded, Size / Dimension="0.402\" L x 0.394\" W (10.20mm x 10.00mm)", Stock 1=3849, Supplier 1=Digi-Key, Supplier Device Package=-, Type=-
L2: library part IN_Ferrite-Bead, "Ferrite Bead, Rdc 0.3R, Z100MHZ 600R, Imax 1A, SMD 1206", DC Current Rating=1, DC Resistance Max=0.08, Ferrite Case Style="1206 ^3216 Metric]", Frequency Range="50MHz to 1", Impedance Tolerance="± 25%", Manufacturer=FAIR-RITE, Manufacturer Part Number=2512066017Y1, Supplier Part Number 1=1612060, Ferrite Mounting=SMD, Impedance=600, Manufacturer PN=2512066017Y1, Storage Location="PCB Assembly WS", Supplier="ECE Dept", Supplier 1=Farnell
P1: "Header, 8-Pin", LatestRevisionDate=17-Jul-2002, LatestRevisionNote="Re-released for DXP Platform.", Publisher="Altium Limited"
P2: "TDK - PS1240P02BT - BUZZER, PIEZO, 70DB, 12.2MM", Frequency=4kHz, Manufacturer 1=TDK, Manufacturer Part Number 1=PS1240P02BT, Max Operating Temperature=70°C, Min Operating Temperature=-10°C, Operating Supply Voltage=3V, Package Quantity=1, Supplier Part Number 1=445-2525-1-ND, ComponentLink1Description=https://datasheet.ciiva.com/0/ef532-ps-112.pdf?src-supplier=Digi-Key, ComponentLink1URL=https://datasheet.ciiva.com/0/ef532-ps-112.pdf?src-supplier=Digi-Key, ComponentLink2Description=https://datasheet.ciiva.com/0/ef532-ps-111.pdf?src-supplier=Digi-Key, ComponentLink2URL=https://datasheet.ciiva.com/0/ef532-ps-111.pdf?src-supplier=Digi-Key, ComponentLink3Description=https://datasheet.ciiva.com/3306/ef532-ps-3306958.pdf?src-supplier=Avnet, ComponentLink3URL=https://datasheet.ciiva.com/3306/ef532-ps-3306958.pdf?src-supplier=Avnet, ComponentLink4Description=https://datasheet.ciiva.com/16225/ef532-ps-16225062.pdf?src-supplier=Onlinecomponents.com, ComponentLink4URL=https://datasheet.ciiva.com/16225/ef532-ps-16225062.pdf?src-supplier=Onlinecomponents.com, Diameter=12.2mm, Height=6.5mm, Lead Free="Lead Free", Mount="Through Hole", Number of Pins=2, Number of Terminals/Pins=2, Packaging="Tape and Reel", Pricing 1="1=0.61000, 10=0.52500, 25=0.49120, 50=0.46580, 100=0.44110 (USD)", RoHS=Yes, RoHS Compliant=Yes, Series=PS, Stock 1=24025, Supplier 1=Digi-Key, Termination="PC Pins", Voltage Rating (DC)=3V, Washable=No
Q1: library part TM_SSM3J328R, "MOSFET P-CH 20V 6A SOT23-3", Case/Package=SOT-23-3, Continuous Drain Current (ID)=6A, Drain to Source Breakdown Voltage=-20V, Drain to Source Resistance=47.4mR, Drain to Source Voltage (Vdss)=20V, Gate to Source Voltage (Vgs)=8V, Input Capacitance=840pF, Input Capacitance (Ciss) @ Vds="840pF @ 10V", Manufacturer=Toshiba, Max Operating Temperature=150°C, Max Power Dissipation=1W, Min Operating Temperature=-55°C, Package / Case="SOT-23-3 Flat Leads", Package Quantity=3000, Power Dissipation=2W, Supplier Device Package=SOT-23F, Supplier Part Number=SSM3J328RLFDKR-ND, ComponentLink1Description=https://datasheet.ciiva.com/11158/ssm3j328r-datasheet-en-20140301-11158652.pdf, ComponentLink1URL=https://datasheet.ciiva.com/11158/ssm3j328r-datasheet-en-20140301-11158652.pdf, Current - Continuous Drain (Id) @ 25° C=6A, Element Configuration=Single, FET Feature="Logic Level Gate, 1.5V Drive", FET Type="MOSFET P-Channel, Metal Oxide", Gate Charge (Qg) @ Vgs="12.8nC @ 4.5V", Manufacturer Part Number=SSM3J328R,LF, Mount="Surface Mount", Number of Channels=1, Number of Elements=1, Number of Pins=3, Packaging="Tape and Reel", Power - Max=1W, Pricing="1=0.79, 10=0.658, 25=0.5772, 100=0.4939, 250=0.42836, 500=0.36284, 1000=0.27972 (NZD)", Radiation Hardening=No, Rds On Max=29.8mR, Storage Location="PCB Assembly WS", Supplier=Digi-Key, Supplier 1=Digi-Key, Supplier Part Number 1=SSM3J328RLFDKR-ND, Turn-Off Delay Time=107ns, Turn-On Delay Time=32ns, Vgs(th) (Max) @ Id="1V @ 1mA"
R1 R2: library part RS_4K7, "RES 4.7K OHM 1/10W 5% 0603 SMD", Storage Location="PCB Assembly WS", Supplier="ECE Dept"
R3 R18: library part RT_1R, "RES 1R OHM 1/4W 5% 1206 SMD", Storage Location="PCB Assembly WS", Supplier="ECE Dept"
R4 R7 R14: library part RS_0R0, "RES 0.0 OHM 1/10W 5% 0603 SMD", Storage Location="PCB Assembly WS", Supplier="ECE Dept"
R5: library part RS_3K, "RES 3K OHM 1/10W 5% 0603 SMD", Storage Location="PCB Assembly WS", Supplier="ECE Dept"
R6: library part RS_1K8, "RES 1.8K OHM 1/10W 5% 0603 SMD", Storage Location="PCB Assembly WS", Supplier="ECE Dept"
R8 R9: library part RS_27R, "RES 27 OHM 1/10W 5% 0603 SMD", Storage Location="PCB Assembly WS", Supplier="ECE Dept"
R10: library part RS_27K, "RES 27K OHM 1/10W 5% 0603 SMD", Storage Location="PCB Assembly WS", Supplier="ECE Dept"
R11: library part RS_47K, "RES 47.0K OHM 1/10W 5% 0603 SMD", Storage Location="PCB Assembly WS", Supplier="ECE Dept"
R12: library part RS_150K, "RES 150K OHM 1/10W 5% 0603 SMD", Storage Location="PCB Assembly WS", Supplier="ECE Dept"
R13: library part RS_100K, "RES 100K OHM 1/10W 5% 0603 SMD", Storage Location="PCB Assembly WS", Supplier="ECE Dept"
R15: library part RS_180K, "RES 180K OHM 1/10W 5% 0603 SMD", Storage Location="PCB Assembly WS", Supplier="ECE Dept"
R16: library part RS_56K, "RES 56.0K OHM 1/10W 5% 0603 SMD", Storage Location="PCB Assembly WS", Supplier="ECE Dept"
R17: library part RS_1K, "RES 1.0K OHM 1/10W 5% 0603 SMD", Storage Location="PCB Assembly WS", Supplier="ECE Dept"
R19: library part RS_3K3, "RES 3.3K OHM 1/10W 5% 0603 SMD", Storage Location="PCB Assembly WS", Supplier="ECE Dept"
S1: "DIP Switch, 4 Position, SPST SMD", Contact Current DC Max=25, Manufacturer="OMRON ELECTRONIC COMPONENTS", Manufacturer Part Number=A6SN-4101, Supplier Part Number 1=2029425, Contact Configuration=SPST, External Length / Height=12.1, No. of Switch Positions=4, Pitch Spacing=2.54, Storage Location="PCB Assembly WS", Supplier="ECE Dept", Supplier 1=Farnell
S2 S3 S4 S5: library part WS_EVQPNF05M, "Panasonic 6 x 3.5mm SMD Light Touch Switch Type SMD", Manufacturer=Panasonic, Supplier Part Number 1=2079481, Manufacturer PN=EVQPNF05M, PackageDescription="6.0 x 3.5 mm", Storage Location="PCB Assembly WS", Supplier="ECE Dept", Supplier 1=Farnell, Supplier 2=Digi-Key, Supplier Part Number 2=P13598SCT-ND
T1: library part TM_BSH105, "MOSFET N-CH 20V 1.05A SOT-23", Current - Continuous Drain (Id) @ 25° C=1.05A, Drain to Source Voltage (Vdss)=20V, Input Capacitance (Ciss) @ Vds="152pF @ 16V", Manufacturer="NXP Semiconductors", Package / Case="TO-236-3, SC-59, SOT-23-3", Power - Max=417mW, Supplier Part Number 1=1758066, FET Type="MOSFET N-Channel, Metal Oxide", Gate Charge (Qg) @ Vgs="3.9nC @ 4.5V", Manufacturer Part Number=BSH105,215, Pricing="1=0.53, 10=0.42, 25=0.3544, 100=0.2885, 250=0.23896, 500=0.1974, 1000=0.14785 (NZD)", Rds On (Max) @ Id, Vgs="200 mOhm @ 600mA, 4.5V", Storage Location="PCB Assembly WS", Supplier="ECE Dept", Supplier 1=Farnell, Supplier 2=Digi-Key, Supplier Part Number 2=568-6215-1-ND
U1: library part NRF24, "nRF24 SMD Module", Warning="No power planes near or under device"
U2: "Accelerometer 3-Axis, +/-2 g / +/-4 g / +/-8 g / +/-16 g with Digital Output, 1.6 KHz BW, Industrial, 14-pin LGA, Tray", Manufacturer="Analog Devices", Supply Current="140 uA", Voltage Supply (V)="2.0 to 3.6", # of Axes=3, -3dB Bandwidth="1.6 KHz", ComponentLink1Description="Manufacturer URL", ComponentLink1URL=http://www.analog.com/en/index.html, ComponentLink2Description=Datasheet, ComponentLink2URL=http://www.analog.com/static/imported-files/data_sheets/ADXL345.pdf, ComponentLink3Description="Package Specification", ComponentLink3URL=http://www.analog.com/static/imported-files/data_sheets/ADXL343.pdf, ComponentLink4Description="Product URL", ComponentLink4URL=http://www.analog.com/en/mems-sensors/mems-inertial-sensors/adxl345/products/product.html, DatasheetVersion="Rev. D", Manufacturer 1="Analog Devices", Manufacturer Part Number 1=ADXL345BCCZ, Mounting Technology="Surface Mount", Output Type=Digital, PackageDescription="14-Pin Land Grid Array, 3 x 5 mm Body, 0.8 mm Pitch", PackageReference=CC-14-1, PackageVersion="03-16-2010-A, 03/2010", Packing=Tray, PartNumber=ADXL345BCCZ, Sensitivity="256/128/64/32 LSB/g"
U3 U5: library part SV_CAT6219-330TDGT3, "IC REG LIN 3.3V 500MA TSOT23-5", Base Part Number=CAT6219, Current - Output=500mA, Package / Case="SOT-23-5 Thin, TSOT-23-5", Supplier Device Package=TSOT-23-5, Supplier Part Number=CAT6219-330TDGT3CT-ND, Voltage - Input (Max)=5.5V, Voltage - Output (Min/Fixed)=3.3V, Voltage Dropout (Max)="0.5V @ 500mA", ComponentLink1Description=http://www.onsemi.com/pub/Collateral/CAT6219-D.PDF, ComponentLink1URL=http://www.onsemi.com/pub/Collateral/CAT6219-D.PDF, ComponentLink2Description="CAT6219 Datasheet", ComponentLink2URL=\\maxwell\elecapp\AltiumDesigner\Libraries\DatasheetsNew\ENCE461\CAT6219-D.PDF, Manufacturer Part Number=CAT6219-330TDGT3, Supplier=Digi-Key, Supplier 1=Digi-Key
U4: library part SE_ATSAM4S16BA-MU, "IC MCU 32BIT 512KB FLASH 64LQFP", Manufacturer=Atmel, Package / Case=64-LQFP, Supplier Part Number 1=ATSAM4S8BA-ANRCT-ND, Voltage - Supply (Vcc/Vdd)="1.62 V ~ 3.6 V", Code_JEDEC=MO-220VMMD-3, ComponentLink1Description="Manufacturer URL", ComponentLink1URL=http://www.atmel.com/, ComponentLink2Description="SAM4S Series Datasheet", ComponentLink2URL=http://www.atmel.com/dyn/resources/prod_documents/11100.pdf, ComponentLink3Description="SAM4S Series Summary", ComponentLink3URL=http://www.atmel.com/dyn/resources/prod_documents/11100S.pdf, Connectivity="I²C, IrDA, Memory Card, SPI, SSC, UART/USART, USB", Core Processor="ARM® Cortex®-M4", Core Size=32-Bit, Data Converters="A/D 11x12b, D/A 2x12b", Manufacturer Part Number=ATSAM4S8BA-ANR, Number of I/O=47, PackageDescription="64-Pin Quad Flat No-Lead (QFN) Sawn, 9 x 9 x 1.0 mm Body, 0.5 mm Pitch, Exposed Pad", PackageReference=64PS, PackageVersion="revJ, Jul-2007", Packaging="Cut Tape (CT)", Peripherals="Brown-out Detect/Reset, DMA, POR, PWM, WDT", Program Memory Size="512KB (512K x 8)", Program Memory Type=FLASH, RAM Size="128K x 8", Speed=120MHz, Supplier 1=Digi-Key
U6: library part ADP2302ARDZ-5.0-R7, "IC REG BUCK 5V 2A 8SOIC", Current - Output=2A, Frequency - Switching=700kHz, Supplier Part Number 1=ADP2302ARDZ-5.0-R7CT-ND, Voltage - Input (Max)=20V, Voltage - Output (Min/Fixed)=5V, ComponentLink1Description="ADP2302ARDZ-5.0 Datasheet", ComponentLink1URL=\\maxwell\elecapp\AltiumDesigner\Libraries\DatasheetsNew\ENCE461\ADP2302_2303.pdf, Manufacturer_Part_Number=ADP2302ARDZ-5.0-R7, Output Type=Fixed, Supplier 1=Digi-Key, Type=DEV, Vendor="Analog Devices Inc"
U7: "1.8V - 5V level converter"
Y1: library part XT_CRYSTAL_12MHz_18pF, "CRYSTAL 12MHZ 18PF 6X3.5mm SMD", ESR (Equivalent Series Resistance)="60 Ohm", Frequency Stability=±50ppm, Frequency Tolerance=±30ppm, Load Capacitance=18pF, Manufacturer="CTS-Frequency Controls", Manufacturer Part Number=406C35D12M00000, Operating Mode=Fundamental, Operating Temperature="-20°C ~ 70°C", Package / Case="4-SMD, No Lead (DFN, LCC)", Supplier Part Number 1=CTX855CT-ND, Frequency=12MHz, Height="0.047\" (1.20mm)", Mounting Type="Surface Mount", Size / Dimension="0.236\" L x 0.138\" W (6.00mm x 3.50mm)", Supplier 1=Digi-Key

## Via types
v1: diameter 1, hole 0.5, Top Layer to Bottom Layer, 50 vias
v2: diameter 0.6, hole 0.3, Top Layer to Bottom Layer, 42 vias
v3: diameter 0.8, hole 0.4, Top Layer to Bottom Layer, 12 vias
v4: diameter 1, hole 0.4, Top Layer to Bottom Layer, 5 vias
v5: diameter 0.8, hole 0.3, Top Layer to Bottom Layer, 1 vias
v6: diameter 0.8, hole 0.5, Top Layer to Bottom Layer, 1 vias

## Nets (pads, with @x,y where several pads share a name; then routed paths per layer and width w, separated by ;. In a path a pad name is that pad's centre, name@x,y a point inside that pad or via, vN(x,y) a via of type N, cw(c..) or ccw(c..) an arc to the next point about the centre after c; other vN are vias at no path point)
3V3: 3V3_E.1 ACCEL_3V3.1 C4.2 C5.2 C14.2 C16.2 C18.2 C20.2 C22.2 DL1.2 DL2.2 H1.7 H1.8 P1.1 R1.1 R2.1 R7.2 S1.1 S1.2 S1.3 S1.4 S4.1 S5.1 U2.1 U2.6 U4.1 U4.7 U4.18 U4.45 U4.58 U7.6 | length 91.2
  Top Layer w0.25: 36.486,60.75 U4.58
  Top Layer w0.3: v2(23.244,63.244) 23.25,63.25 U4.18 ; v1(32.7,67.2) 32.75,67.15 U4.7 ; v2(34,60.3) 36.036,60.3 36.486,60.75 ; v2(34.1,56.3) 34.234,56.166 34.234,55.526 34.25,55.51 U4.45 ; U4.1 36.075,65.2 v1(38,65.2) ; v2(37.9,39.7) v2@38,39.8 ; 3V3_E.1 56.8,67 v1(56.9,66.9)
  Top Layer w0.5: v1(14.6,46.8) 15.6,47.8 S4.1 18.25,43.15 S5.1 ; R7.2 30.091,36.009 30.091,35.764 30.455,35.4 31.255,35.4 32.855,33.8 36.6,33.8 v1(38.4,32) 39.3,32.9 40.25,32.9 40.3,32.95 40.973,32.277 41.223,32.277 C5.2 42,31.9 U2.1 ; S1.4 S1.3 ; v1(34.2,79.3) 34.26,79.36 S1.3 ; v2@38,39.8 R1.1 ; S1.1 S1.2 S1.3 ; U2.6 46.048,33.977 46.048,32.552 46.2,32.4 C4.2 46.904,32.404 47.804,32.404 v1(47.9,32.5) 47.9,31.6 46.4,30.1 46.4,24.7 48.475,22.625 51.125,22.625 U7.6
  Top Layer w0.6: DL1.2@58.2,41.2 58.2,37.6 v1(58.3,37.6)
  Bottom Layer w0.3: v2(23.244,63.244) 25.456,63.244 25.8,62.9 C18.2 ; C14.2 v1(32.7,67.2) ; C16.2 33.9,55 34.1,55.2 v2(34.1,56.3) ; v2(34,60.3) 34.6,59.7 37,59.7 C20.2 ; C22.2 36.85,65.4 37.05,65.2 v1(38,65.2)
3V3_RADIO: R4.1 U1.1 | length 2.7
  Top Layer w0.5: R4.1 3.6,63.143 4.157,63.7 4.957,63.7 5.157,63.9 U1.1
5V: BUZ_5V.1 C1.1 C6.1 H4.1 P1.2 P2.1 R14.2 R17.2 REG_5V.1 U3.1 U5.1 U5.3 U7.1 | length 62.9
  Top Layer w0.3: U3.1@3.6,33.3 U3.1 ; v1(19.9,28.7) v1@19.9,28.9
  Top Layer w0.5: v1(3.6,28.3) U3.1@3.6,33.3 ; C6.1 24.9,32.5 28.65,28.75 29.55,28.75 v1(29.6,28.7) ; C6.1 ccw(c23.814,33.786) 25.35,33.786 U5.1 25.35,34.825 25.7,35.175 27.074,35.175 27.25,34.999 U5.3 31.55,34.05 33.3,32.3 REG_5V.1 ; BUZ_5V.1 U7.1
  Top Layer w0.6: H4.1 63,26.26 63,32.92 P1.2
  Top Layer w0.8: R17.2 47.9,5.55 48.75,4.7 P2.1
  Top Layer w1: R14.2 v1@19.9,28.9 ; BUZ_5V.1 57.46,22.66 H4.1
ACCEL_CS: U2.7 U4.37 | length 33.2
  Top Layer w0.25: U4.37 30.25,48.75 v2(32.2,46.8) ; U2.7 47.3,36.325 v2(47.3,43.3)
  Bottom Layer w0.25: v2(32.2,46.8) 44.4,46.8 47.3,43.9 v2(47.3,43.3)
ACCEL_I2C_CLK: ACCEL_CLK.1 R2.2 U2.14 U4.36 | length 27.1
  Top Layer w0.3: U4.36 29.725,54.45 29.725,53.125 29.475,52.875 29.475,44.425 35.7,38.2 36.65,37.25 38.035,35.865 40.48,35.865 40.596,35.75 U2.14@40.615,35.75 ; R2.2 40.3,34.45 40.5,34.65 40.5,35.635 U2.14@40.615,35.75 ; U2.14 U2.14@40.615,35.75
ACCEL_I2C_IO: ACCEL_IO.1 R1.2 U2.13 U4.43 | length 21
  Top Layer w0.3: U4.43 33.25,49.05 38.925,43.375 41.4,40.9 R1.2 41.4,39.7 42,39.1 U2.13 ; ACCEL_IO.1@39.45,43.15 ACCEL_IO.1
ACCEL_INT_1: U2.8 U4.41 | length 26.5
  Top Layer w0.25: v2(32.2,52.6) 32.225,52.625 32.225,54.45 U4.41 ; v2(34.6,50.4) 40.5,50.4 46.2,44.7 46.2,39.948 46,39.748 U2.8
  Bottom Layer w0.25: v2(32.2,52.6) v2@34.4,50.4
  Bottom Layer w0.5: v2@34.4,50.4 v2(34.6,50.4)
ACCEL_INT_2: U2.9 U4.38 | length 28.5
  Top Layer w0.25: U4.38 30.75,50.45 31.2,50 31.2,49.3 31.6,48.9 v2(32.2,48.9) ; v2(35.3,49.1) 40.5,49.1 45.2,44.4 U2.9
  Bottom Layer w0.25: v2(32.2,48.9) 34.965,48.9 35.165,49.1 v2(35.3,49.1)
"BATT ADC": BAT_ADC.1 R12.1 R13.2 U4.3 | length 89.2
  Top Layer w0.3: v2(34.5,62.4) 34.75,62.65 U4.3 ; BAT_ADC.1 v2(35.2,7.7)
  Top Layer w0.6: 27.2,2.1 R12.1 27.6,2.1 33,2.1 BAT_ADC.1
  Bottom Layer w0.5: v2(34.5,62.4) 34.55,62.35 37.636,62.35 38.9,61.086 38.9,60.6 39.4,60.1 39.924,60.1 40.1,59.924 40.1,57.9 42.2,55.8 42.2,55.7 51.1,46.8 51.1,23.6 v2(35.2,7.7)
BUZZER_CONT: R19.1 U4.49 | length 52.1
  Top Layer w0.3: U4.49 37.55,56.275 39.275,56.275 v2(39.3,56.3)
  Top Layer w0.5: v2(41.2,18.1) 41.2,15.3 R19.1
  Bottom Layer w0.5: v2(39.3,56.3) 49.8,45.8 49.8,28 41.2,19.4 v2(41.2,18.1)
D_N: H2.2 R9.1 | length 5.4
  Top Layer w0.381: R9.1@54.809,60.84 R9.1 54.65,61.05 H2.2
D_P: H2.3 R8.1 | length 5.7
  Top Layer w0.381: R8.1 55.39,62.3 55.39,61.7 H2.3
DEBUG_SWITCH_1: S4.2 SWITCH_1.1 U4.19 | length 20.1
  Top Layer w0.25: v2(21.7,62.2) 22.981,62.2 23.331,62.55 24.652,62.55 24.852,62.75 U4.19 ; S4.2 23.1,48.15 22.8,48.45 v2(22.8,54.2)
  Bottom Layer w0.25: v2(21.7,62.2) 22.8,61.1 v2(22.8,54.2)
DEBUG_SWITCH_2: S5.2 SWITCH_2.1 U4.20 | length 25
  Top Layer w0.25: S5.2 22.8,43.7 27,47.9 v2(27,48.7) ; v2(23.6,61.9) 24.709,61.9 25.059,62.25 U4.20
  Bottom Layer w0.25: v2(23.6,61.9) 23.6,52.2 27,48.8 v2(27,48.7)
ERASE: ERASE.1 U4.55 | length 49
  Top Layer w0.25: v2(32.25,59.25) 35.65,59.25 ; 35.7,59.3 35.75,59.25 U4.55 ; v2(44.9,69.7) 45.4,70.2 53.1,70.2 55.1,72.2 61.6,72.2 61.6,69.7 ERASE.1@61.7,69.6
  Bottom Layer w0.25: v2(32.25,59.25) 32.25,61.405 33.195,62.35 33.336,62.35 33.7,62.714 33.7,68.2 34.6,69.1 36.2,69.1 38.6,71.5 43.8,71.5 44.9,70.4 v2(44.9,69.7)
EXTCLK_IN: C8.2 EXTCLK_IN.1 U4.62 Y1.3 | length 17.6
  Top Layer w0.3: U4.62 39.25,62.75 41.5,65 45.8,65 Y1.3@47,66.2 ; C8.2 47,67.8 Y1.3 Y1.3@47,66.2 ; EXTCLK_IN.1 49.5,65.4 48.7,66.2 Y1.3@47,66.2
EXTCLK_OUT: C11.2 EXTCLK_OUT.1 U4.61 Y1.1 | length 10
  Top Layer w0.3: U4.61 42.05,62.25 42.2,62.4 C11.2 ; Y1.1@42.6,63.8 42.9,63.5 C11.2 ; EXTCLK_OUT.1 45.1,62.4 C11.2
GND: BAT_GND.1 C1.2 C2.1 C3.1 C4.1 C5.1 C6.2 C7.1 C8.1 C10.1 C11.1 C12.1 C13.1 C14.1 C15.2 C16.1 C17.2 C18.1 C19.2 C20.1 C21.2 C22.1 C24.1 D1.1 GND1.1 GND2.1 GND3.1 GND4.1 H1.5 H1.6 H2.5 H2.6 H3.1 H3.3 H4.3 J1.1 J1.2 L2.2 LED_GND.1 P1.3 P1.4 Q1.1 R11.1 R13.1 R16.1 R18.1 S2.1 S3.1 T1.2 U1.2 U2.2 U2.4 U2.5 U3.2 U4.2 U4.17 U4.46 U4.60 U5.2 U6.7 U6.EPAD U7.2 U7.5 | length 9.2
  Top Layer w0.3: v1(6.4,58.8) v1@6.4,58.9 ; v3(24.7,64.1) 25.6,64.1 25.95,63.75 U4.17 ; C6.2 U5.2 ; v3(41.6,61.2) 42.7,61.2 C11.1 ; H2.6@62.45,58.15 62.5,58.2 H2.6@62.55,58.15
  Bottom Layer w0.3: C19.2 31.1,61.8 v3(31.1,61.7) 31.2,61.7 C14.1
  other v1: 42.8,3.8 31.6,7.3 45.9,10.6 49.9,19.8 32.3,21.1 55.6,23.1 49.1,24.5 14.5,24.8 12.2,26 24.2,29.2 58.7,30.1 30,32.6 1.3,34.6 21.9,38.3 5.6,41.6 3.3,45.8 34.6,52.4 5.9,53.9 59.9,56.9 28.039,60.739 28.1,72.9
  other v2: 19,25.5 35.7,61.1
  other v3: 24.2,1.4 27.7,5.1 10.4,14.4 6.8,39.5 6.4,62.4 39.7,64.9 36.4,66.9 50.1,67.9 41.7,69.6
  other v4: 44,30.4 5.3,31.5
  other v5: 39,59
LED_GREEN: LED_G.1 R6.2 U4.47 | length 29.9
  Top Layer w0.3: 35.25,53.15 U4.47
  Top Layer w0.5: 35.25,53.15 36,52.4 41.2,52.4 51.1,42.5 51.1,39.676 51.276,39.5 53.5,39.5 53.6,39.6 53.6,37.4 LED_G.1@54.1,36.9
LED_RED: LED_R.1 R5.2 U4.48 | length 25.5
  Top Layer w0.3: U4.48 36.925,53.3
  Top Layer w0.5: 36.925,53.3 41.5,53.3 51.1,43.7 54.2,43.7 53.45,42.95 R5.2@53.45,41.4
NetBAT_BEF_1: BAT_BEF.1 F1.1 H3.2 | length 7.3
  Top Layer w0.3: H3.2 H3.2@13.864,5.576 ; BAT_BEF.1@16.35,7.05 BAT_BEF.1
  Top Layer w0.6: H3.2@13.864,5.576 15.166,5.576 15.517,5.225 16.35,5.225 ; F1.1 16.35,5.225 ; BAT_BEF.1@16.35,7.05 16.35,5.225
NetBUCK_OUT_1: BUCK_OUT.1 C12.2 C13.2 L1.2 R14.1 U6.5 | length 34.6
  Top Layer w0.3: R14.1@16.689,28.839 R14.1 R14.1@16.7,28.95
  Top Layer w0.5: R14.1@16.7,28.95 16.7,30 18.4,31.7 24.4,31.7 28.45,27.65 28.45,22.2 28.45,18.35 L1.2 BUCK_OUT.1
  Top Layer w1: U6.5 R14.1@16.689,28.839
NetBUZ_SIG_1: BUZ_SIG.1 R19.2 T1.1 | length 10.7
  Top Layer w0.3: BUZ_SIG.1@42.7,9.1 42.7,8.3 43.7,7.3 BUZ_SIG.1@43.7,9 ; R19.2@43.7,14.25 R19.2
  Top Layer w0.5: BUZ_SIG.1@43.7,9.5 43.7,14.25 T1.1
NetC2_2: C2.2 R3.1 RC_3V3.1 U3.5 | length 37.8
  Top Layer w0.5: R3.1 1.85,59.1 4.3,59.1 8.2,55.2 8.2,51 1.2,51 1.2,39.8 RC_3V3.1 2.523,38.477 4.423,38.477 C2.2 3.65,36.35 U3.5
NetC3_2: C3.2 R3.2 R4.2 | length 3.9
  Top Layer w0.5: R3.2 ccw(c2.686,63.136) 2.686,61.6 R4.2 cw(c3.6,60.634) 4.283,61.317 C3.2 C3.2@5,60.65
NetC7_2: C7.2 R7.1 REG_3V3.1 U5.5 | length 8.4
  Top Layer w0.5: U5.5 25.3,36.8 C7.2 R7.1 31,38.4 REG_3V3.1
NetC9_1: C9.1 D1.2 L1.1 U6.8 | length 16.8
  Top Layer w0.5: D1.2@12.4,21.425 12.4,19.9 L1.1 16.6,20.4 C9.1 18.184,22.1 U6.8
NetC9_2: C9.2 U6.1 | length 2.2
  Top Layer w0.3: C9.2 C9.2@19.816,22.1
  Top Layer w0.5: C9.2@19.816,22.1 U6.1
NetC15_1: C15.1 C17.1 C19.1 C21.1 U4.8 U4.12 U4.24 U4.54 | length 39.8
  Top Layer w0.3: v1(24.8,59.4) 24.8,59.517 cw(c25.483,59.517) 25,60 25.25,60.25 U4.24 ; U4.12@30.284,64.785 30.284,63.941 ; U4.8 32.25,64.49 31.86,64.1 31.172,64.1 31.013,63.941 30.284,63.941 ; U4.54 35.95,58.75 v1(35.5,58.3) 35.425,58.375 32.525,58.375 32.15,58 v1(28.9,58) 28.9,59 29.95,60.05 29.95,61.869 29.75,62.069 29.75,63.65 30.041,63.941 30.284,63.941
  Bottom Layer w0.3: v1(24.8,59.4) 24.989,59.4 25.439,59.85 C17.1 28.931,59.85 29.95,60.869 ; v1(28.9,58) 29.95,59.05 29.95,60.869 ; C21.1 C19.1 29.65,64.6 28.9,63.85 28.9,62.655 29.105,62.45 29.369,62.45 29.95,61.869 29.95,60.869 ; v1(35.5,58.3) 36.8,58.3 C15.1
NetC23_1: C23.1 R18.2 | length 2
  Bottom Layer w0.3: R18.2@43.05,69.3 R18.2
  Bottom Layer w0.5: C23.1 cw(c44.452,67.8) 43.001,69.251 R18.2@43.05,69.3
NetC23_2: C23.2 C24.2 L2.1 U4.64 | length 12.5
  Top Layer w0.3: U4.64 37.752,63.75 38.85,64.848 38.85,65.552 37.3,67.102 37.3,67.5 v6(39,69.2)
  Bottom Layer w0.3: L2.1 38,67.8 C23.2 ; v6(39,69.2) 39,67.8 C24.2
NetDL1_1: DL1.1 R5.1 | length 1.7
  Top Layer w0.3: R5.1 R5.1@55.2,41.1
  Top Layer w0.5: R5.1@55.15,41.2 DL1.1@56.6,41.2
NetDL2_1: DL2.1 R6.1 | length 1.5
  Top Layer w0.5: R6.1@55.1,39.6 DL2.1@56.6,39.6
NetP2_2: P2.2 R17.1 T1.3 | length 12.2
  Top Layer w0.8: T1.3 47.9,13.3 R17.1 56.25,9.75 P2.2
NetR8_2: R8.2 U4.57 | length 17.7
  Top Layer w0.3: U4.57 51.8,60.25 51.8,62.3 R8.2
NetR9_2: R9.2 U4.56 | length 16.9
  Top Layer w0.3: U4.56 52.3,59.75 52.3,61 R9.2
NetR15_1: R15.1 R16.2 U6.3 | length 11.8
  Top Layer w0.5: U6.3 22.8,26.135 22.8,30.4 24.4,30.4 25.7,29.1 25.7,28 R16.2 ; R15.1@25.85,26.45 R15.1@25.85,26.5 ; R15.1@25.85,26.55 R16.2@25.85,27.9
nRST: H1.1 nRST.1 S2.2 U4.39 | length 98.5
  Top Layer w0.25: S2.2@9.15,43.1 13.2,43.1 v2(13.2,39.7) ; v2(32.1,50.8) 31.5,51.4 31.5,51.7 31.25,51.95 U4.39 31.25,56.05 31.6,56.4 33.1,57.9 34.553,57.9 36.3,56.153 36.3,56.012 36.637,55.675 36.778,55.675 37.253,55.2 43.955,55.2 46.555,52.6 60.6,52.6 v2(61,53)
  Top Layer w0.5: H1.1 60.6,78.24 v2(60.6,73.7)
  Bottom Layer w0.25: v2(13.2,39.7) 21,39.7 v2(32.1,50.8)
  Bottom Layer w0.5: v2(60.6,73.7) 60.6,73.511 61,73.111 v2(61,53)
PA17: P1.8 U4.4 | length 41.9
  Top Layer w0.25: U4.4 34.25,66.56 35.49,67.8 36.145,68.455 36.655,68.455 38.9,70.7 42.5,70.7 44.2,69 v1(44.2,68.1) ; v1(50.7,58.1) 50.7,56.9 v1(53.4,54.2)
  Top Layer w0.5: v1(59.1,50.5) 59.84,49.76 P1.8
  Bottom Layer w0.25: v1(44.2,68.1) 44.2,67.7 50.7,61.2 v1(50.7,58.1) ; v1(53.4,54.2) 57.1,50.5 v1(59.1,50.5)
PA18: P1.7 U4.63 | length 35
  Top Layer w0.25: 36.239,63.25 U4.63 ; v1(48,57.5) 48,56.9 50.2,54.7 v1(50.2,53.9)
  Top Layer w0.3: v1(35.7,63.3) 35.75,63.25 36.239,63.25
  Top Layer w0.5: v1(58.3,48.4) 59.48,47.22 P1.7
  Bottom Layer w0.25: v1(35.7,63.3) 41.6,63.3 47.4,57.5 v1(48,57.5) ; v1(50.2,53.9) 55.7,48.4 v1(58.3,48.4)
PA19: P1.6 U4.59 | length 32
  Top Layer w0.25: U4.59 39.85,61.25 v1(39.9,61.2)
  Top Layer w0.5: v1(53.3,46.6) 58.6,46.6 59.2,46 60.08,46 P1.6
  Bottom Layer w0.25: v1(39.9,61.2) 40.844,60.256 40.844,58.256 42.9,56.2 43.9,56.2 48.533,51.567 48.533,51.367 v1(53.3,46.6)
PA20: P1.5 U4.52 | length 30.9
  Top Layer w0.25: U4.52 39.85,57.75 39.95,57.85 40.199,57.85 40.35,57.699 42.101,57.699 42.302,57.9 44.5,57.9 v2(48.5,53.9)
  Top Layer w0.5: v2(58,43.8) 59.3,42.5 61.04,42.5 P1.5
  Bottom Layer w0.25: v2(48.5,53.9) 57.981,44.419 57.981,43.819 v2(58,43.8)
RADIO_CE: RC_CE.1 U1.3 U4.29 | length 25.5
  Top Layer w0.25: U1.3 7.7,58.5 8.7,57.5 24.5,57.5 24.75,57.75 U4.29
RADIO_CHAN_1: RF1.1 S1.8 U4.10 | length 18.8
  Top Layer w0.25: U4.10@31.275,65.55 31.275,67.575 32.1,68.4 34.89,68.4 37.5,71.01 37.5,71.3 38.925,72.725 39.6,72.725 S1.8@39.182,73.143 ; S1.8 44.5,73.3 RF1.1
RADIO_CHAN_2: RF2.1 S1.7 U4.11 | length 26.8
  Top Layer w0.25: RF2.1 28.25,74.75 29.15,74.75 v1(29.2,74.7) ; U4.11 30.75,67.95 ; 30.78,68.07 30.78,68.78 31.8,69.8 34.1,69.8 35.6,71.3 36.8,71.3 S1.7 36.8,76.1 v1(36.7,76.2)
  Bottom Layer w0.25: v1(29.2,74.7) 30.7,76.2 v1(36.7,76.2)
RADIO_CHAN_3: RF3.1 S1.6 U4.14 | length 32.4
  Top Layer w0.25: RF3.1@27,82.445 27.755,83.2 29,81.955 29,79.8 34.26,74.54 S1.6 34.3,73.26 34.1,73.06 v2(34.1,71.2)
  Top Layer w0.3: U4.14 29.25,61.65 v2(29.3,61.6)
  Bottom Layer w0.25: v2(29.3,61.6) 29.248,61.6 28.998,61.85 28.856,61.85 28.3,62.406 28.3,64.686 29.064,65.45 29.205,65.45 34.1,70.345 v2(34.1,71.2)
RADIO_CHAN_4: RF4.1 S1.5 U4.15 | length 18.9
  Top Layer w0.25: RF4.1 27.15,79.8 28,78.95 28.65,78.95 31.72,75.88 S1.5 31.8,73.23 v2(31.8,70.8) ; U4.15 28.75,66.615 29.1,66.965 v2(29.1,67.1)
  Bottom Layer w0.25: v2(29.1,67.1) 29.6,67.1 31.8,69.3 v2(31.8,70.8)
RADIO_CLK: RC_CLK.1 U1.5 U4.21 | length 20.8
  Top Layer w0.3: U1.5 10.243,61.276 10.419,61.1 22.495,61.1 22.795,60.8 24.281,60.8 25.206,61.725 25.85,61.725 25.875,61.75 U4.21 ; RC_CLK.1@16.3,59.6 RC_CLK.1
RADIO_CS: RC_CS.1 U1.4 U4.28 | length 23.2
  Top Layer w0.25: U1.4 8.971,59.471 9.543,58.9 14.214,58.9 14.814,58.3 23.2,58.3 24.698,58.3 24.748,58.25 U4.28
RADIO_IRQ: RC_IRQ.1 U1.8 U4.16 | length 21.4
  Top Layer w0.25: U1.8 14.057,63.5 18.8,63.5 RC_IRQ.1 21.798,65.4 22.398,66 v2(22.4,66) ; U4.16 28.25,68.25 v2(28.3,68.3)
  Bottom Layer w0.25: v2(22.4,66) 22.4,66.1 24.6,68.3 v2(28.3,68.3)
RADIO_SI: RC_SI.1 U1.6 U4.22 | length 30.8
  Top Layer w0.3: U1.6 11.514,61.9 20.4,61.9 23.4,64.9 26.647,64.9 27.7,63.847 27.7,61.653 27.454,61.407 cw(c27.075,61.785) 27.075,61.25 U4.22 26.45,61.225 25.413,61.225 24.841,60.652 24.488,60.3 21.3,60.3 RC_SI.1@20.6,59.6
RADIO_SO: RC_SO.1 U1.7 U4.27 | length 28.1
  Top Layer w0.3: U1.7 12.786,62.8 19.905,62.8 21.605,64.5 22,64.5 23,65.5 26.754,65.5 25.9,66.354 RC_SO.1 ; U4.27 27.55,58.75 28.4,59.6 28.4,59.898 29.1,60.598 29.1,60.881 28.4,61.581 28.4,63.854 26.854,65.4
RADIO_V_EN: U3.3 U4.30 | length 37.5
  Top Layer w0.25: U3.3 6.75,33.35 v1(7.6,34.2) ; v1(16,54) 18.7,54 19.4,54.7 21.1,54.7 22.3,55.9 23.6,55.9 24.95,57.25 U4.30